# Altium PCB NE-CurrentSense-V2.PcbDoc
Units mm, origin at the board's own origin, x right, y up, seen from the top; angles counter-clockwise.
Board outline 98.25 x 80.25 mm, 2 copper layers (Top Layer, Bottom Layer); 35 components, 19 nets, 87 pads, 480 vias.
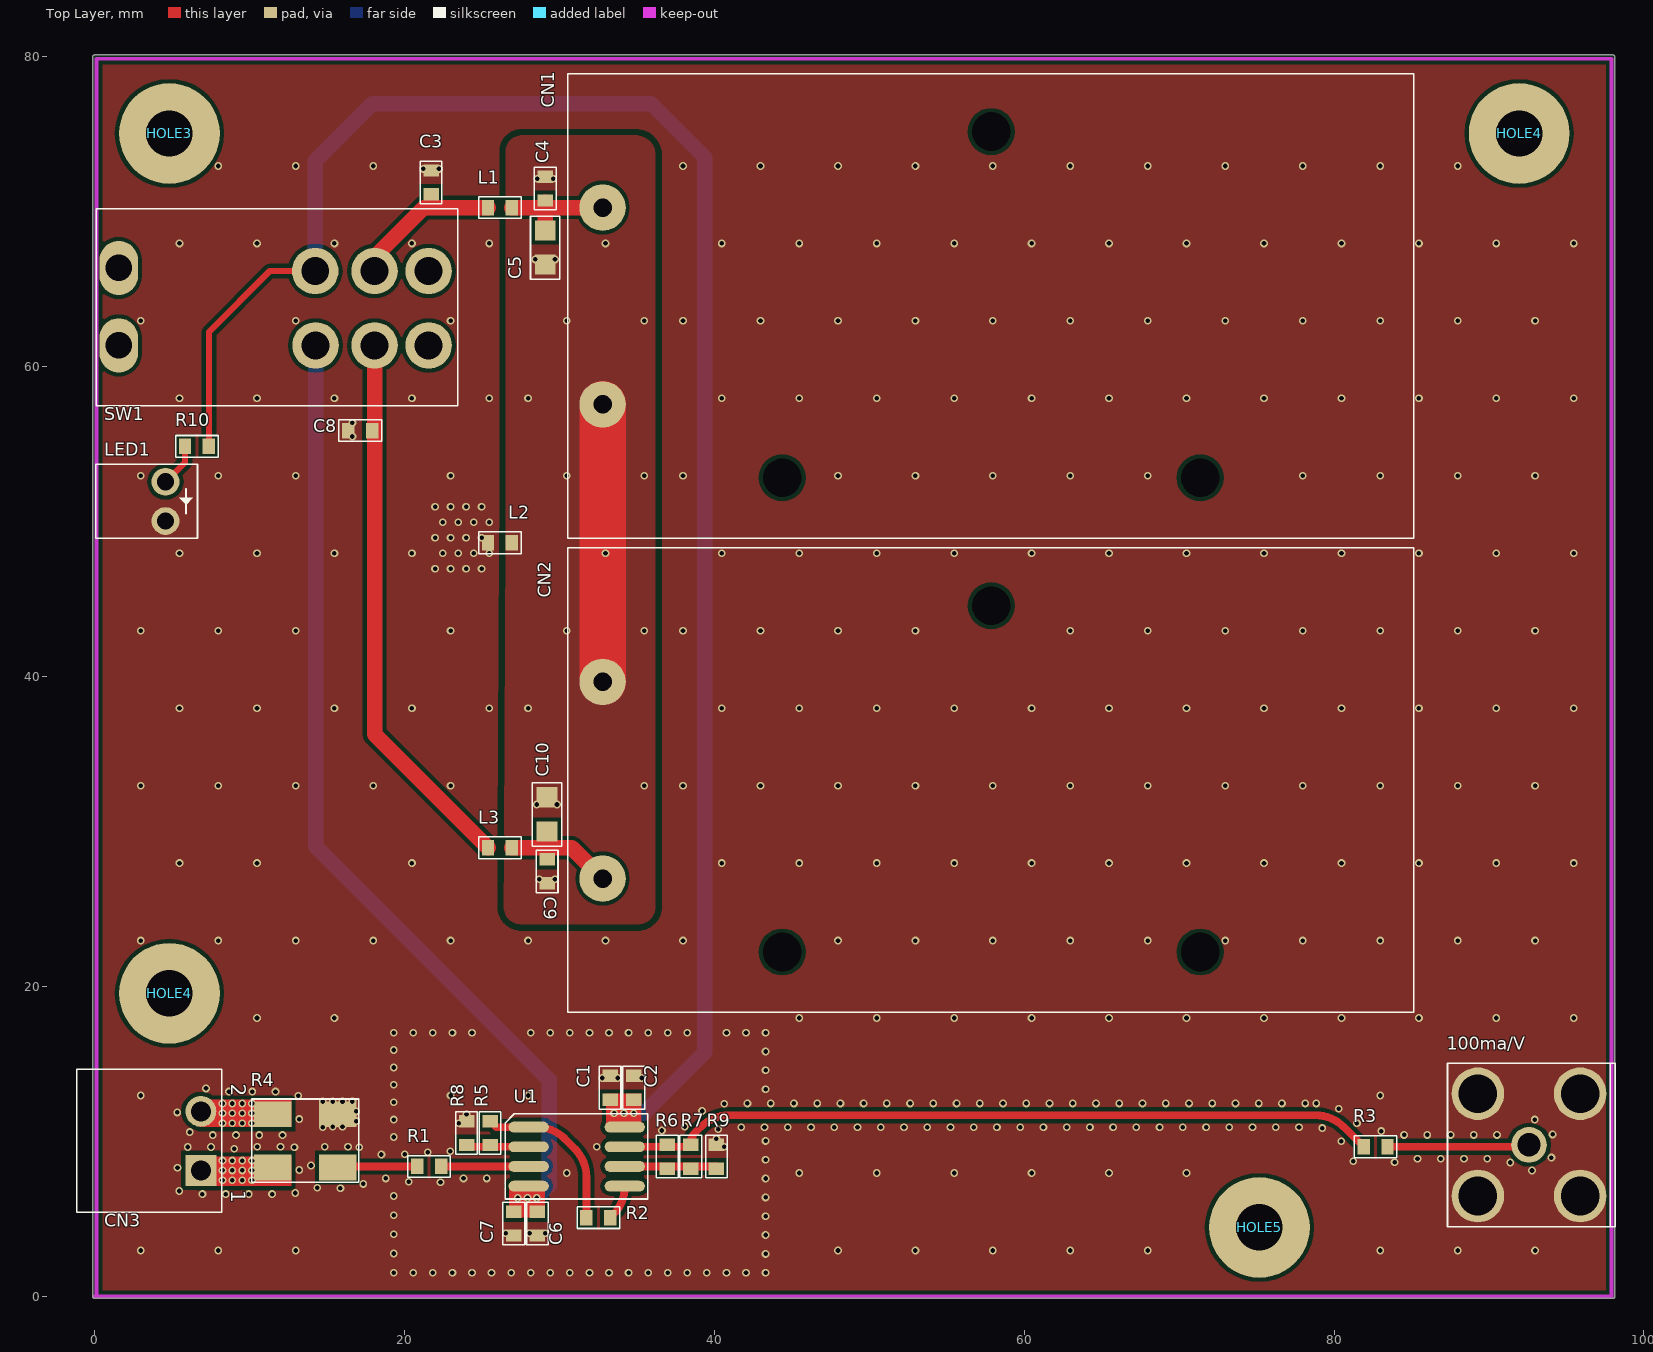
[diagram p0: Top Layer view]
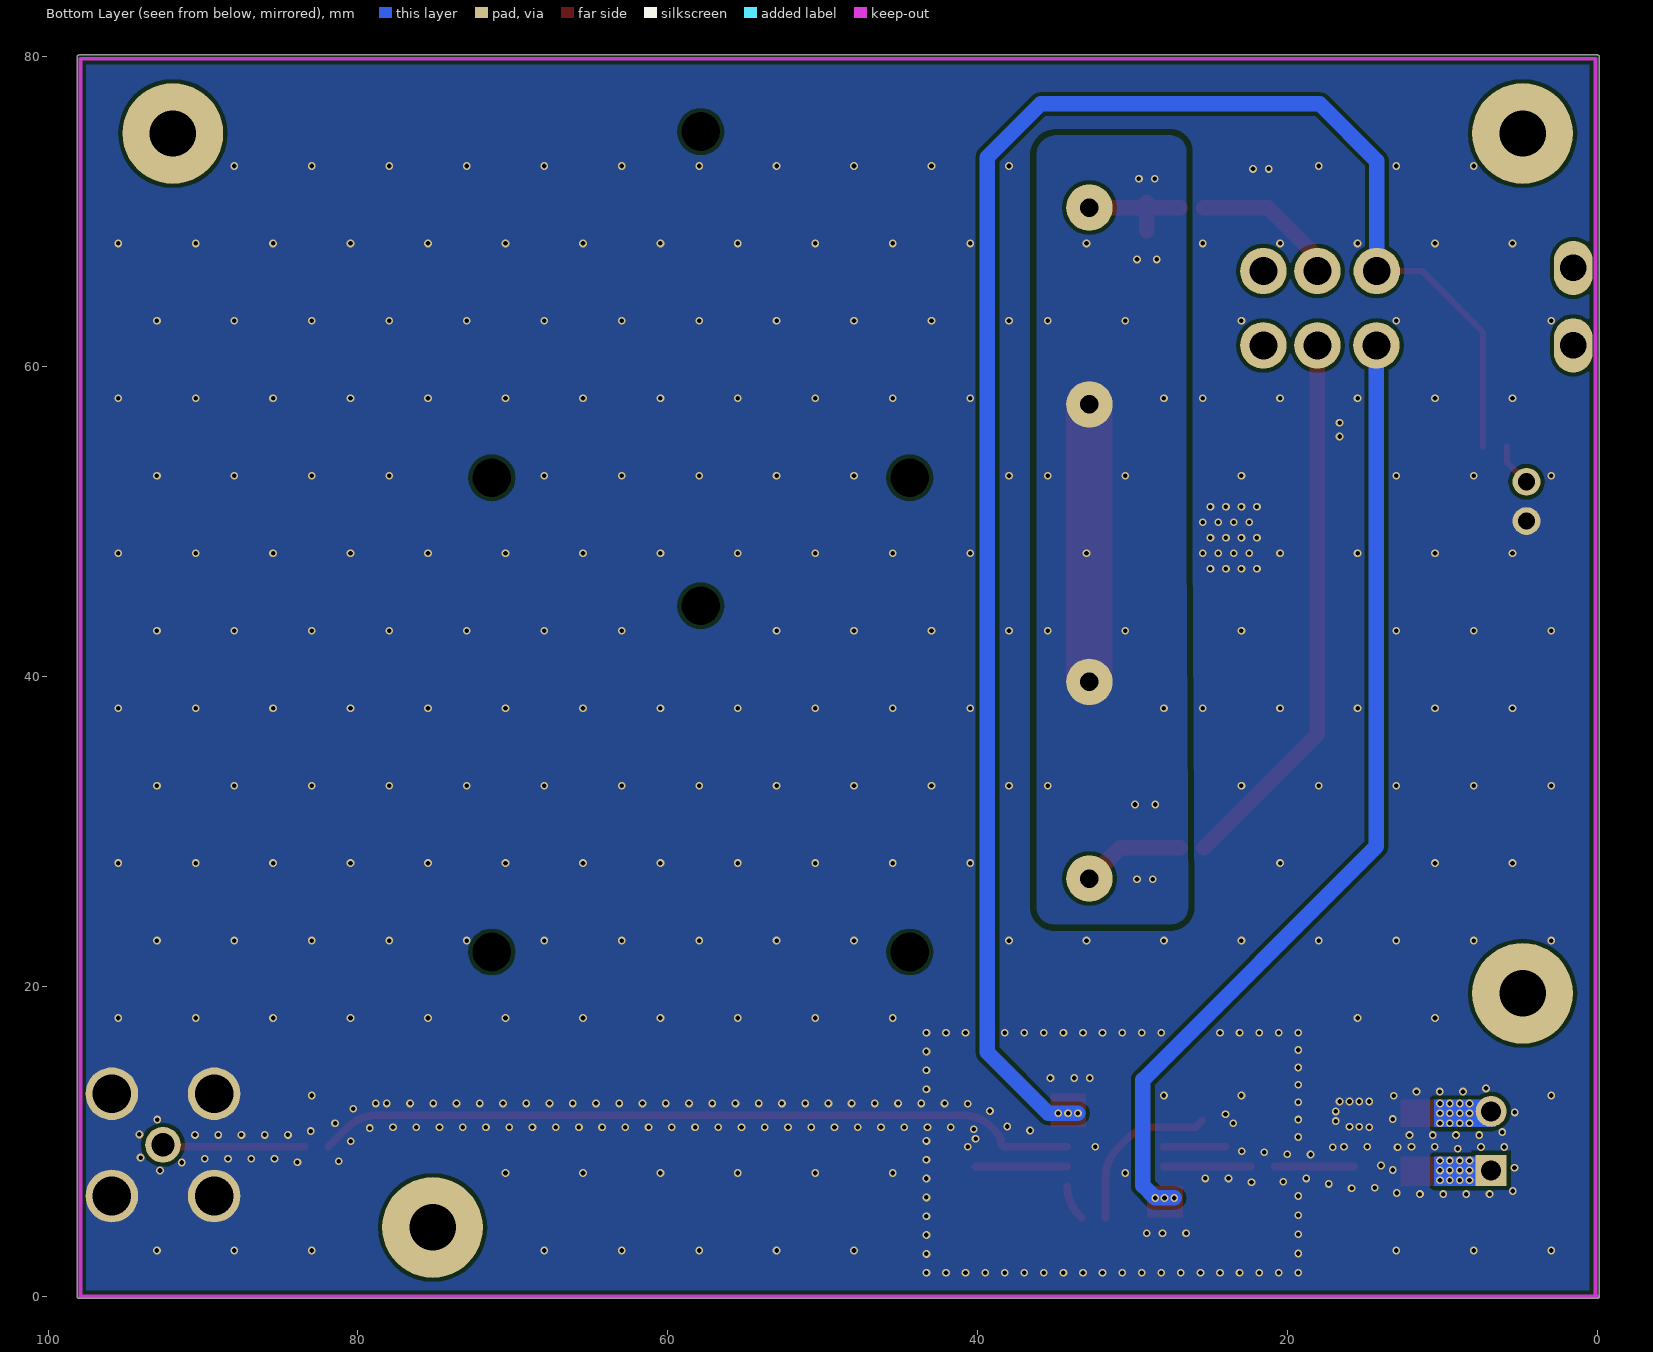
[diagram p1: Bottom Layer view, seen from below]
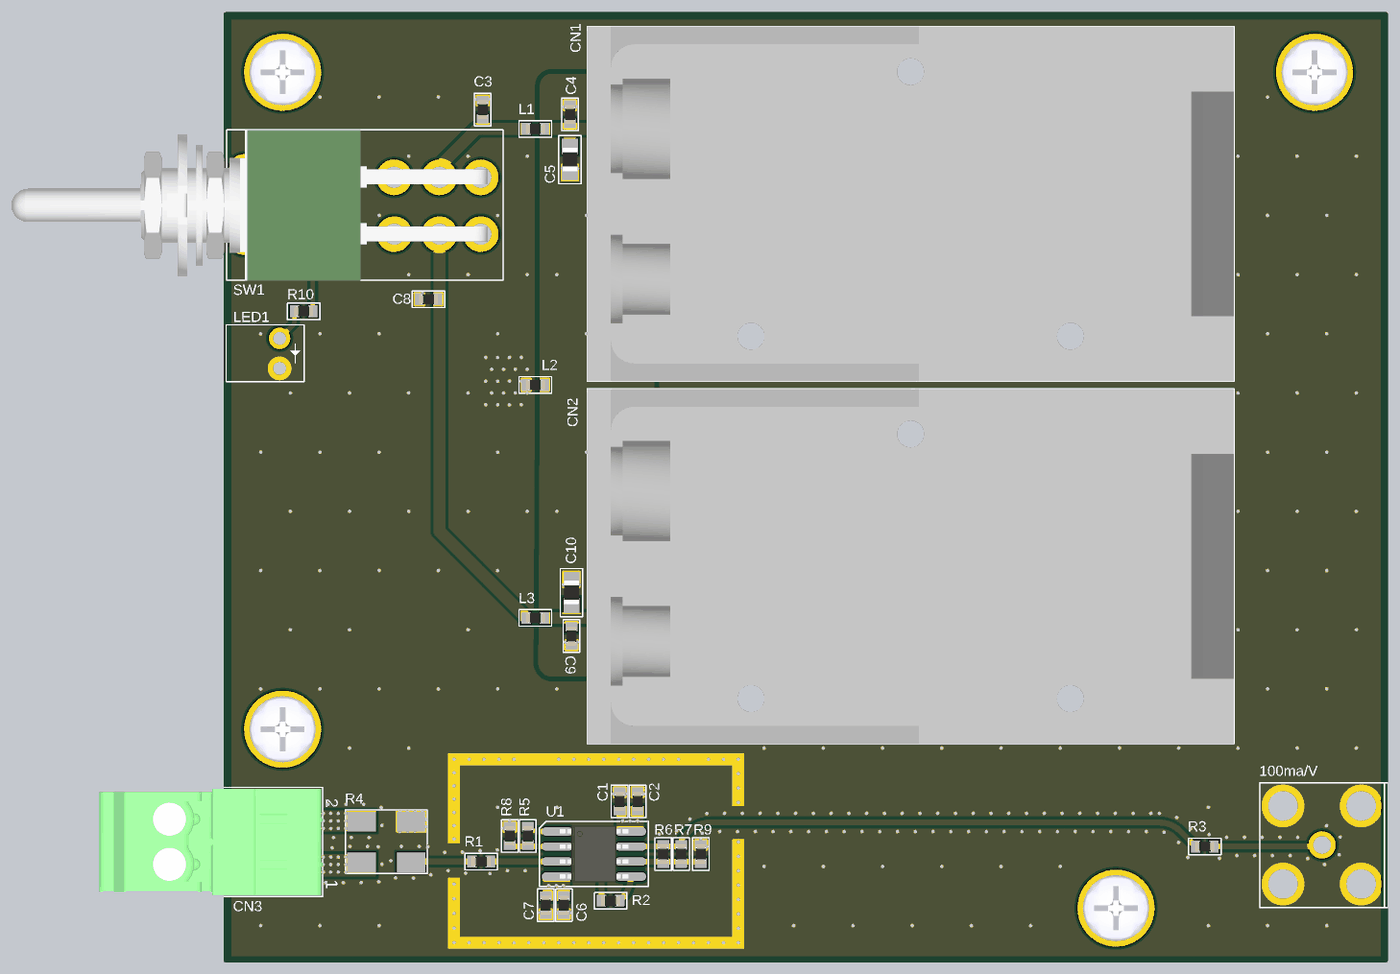
[diagram p2: 3D render of the assembled board from above, using the file's embedded part models]

## Layer stack, top to bottom
Top Solder: solder mask 0.0102, Solder Resist, Dk 3.5
Top Layer: signal copper 0.0356
Dielectric 1: dielectric 0.32, FR-4, Dk 4.8
Bottom Layer: signal copper 0.0356
Bottom Solder: solder mask 0.0102, Solder Resist, Dk 3.5

## Board outline
-0.127,0 ccw(c0,0) 0,-0.127 97.917,-0.127 ccw(c97.917,0) 97.958,-0.12 97.959,-0.12 ccw(c98,0) 98.127,0 98.127,80 ccw(c98,80) 98,80.127 0,80.127 ccw(c0,80) -0.127,80

## Design rules (kind name [scope] priority, off if disabled: settings)
Clearance [InNet('GND') vs InNet('NetC4_1')] p1: gap=0.4 ignorepadtopadclearanceinfootprint=FALSE
Clearance Clearance_1 [All] p2: gap=0.254 ignorepadtopadclearanceinfootprint=FALSE except(0: Arc-Hole Track-Hole SMDPad-Hole THPad-Hole Via-Hole Fill-Hole Poly-Hole Region-Hole Text-Hole)
PolygonConnect [All] p1: connectstyle=Direct reliefconductorwidth=0.254 reliefentries=4 polygonreliefangle="90 Angle" airgapwidth=0.254
RoutingVias [All] p1: holewidth=0.711 width=1.27 viastyle="Through Hole" minholewidth=0.711 minwidth=1.27 maxholewidth=0.711 maxwidth=1.27
SolderMaskExpansion [All] p1: expansion=0.102
Width [All] p1: maxlimit=4 minlimit=0.254 preferedwidth=0.254
30 further rules are at their usual default settings.

## Components (designator, comment, footprint, x,y, rotation, side; value= is the part's Value field where it differs from the comment)
100ma/V "Conn BNC" "CONN BNC-JACK" 92.583,9.779 r270 top value="Jack BNC"
C1 "Capacitor Cerâmico" CC0603 33.274,13.462 r270 top value=100nF
C2 "Capacitor Cerâmico" CC0603 34.798,13.462 r270 top value=1uF
C3 "Capacitor Cerâmico" CC0603 21.717,71.901 r270 top value=1uF
C4 "Capacitor Cerâmico" CC0603 29.083,71.501 r270 top value=1uF
C5 "Capacitor Cerâmico" CC0805 29.083,67.691 r90 top value=10uF
C6 "Capacitor Cerâmico" CC0603 28.575,4.699 r270 top value=100nF
C7 "Capacitor Cerâmico" CC0603 27.051,4.699 r270 top value=1uF
C8 "Capacitor Cerâmico" CC0603 17.145,55.88 r180 top value=1uF
C9 "Capacitor Cerâmico" CC0603 29.21,27.432 r270 top value=1uF
C10 "Capacitor Cerâmico" CC0805 29.21,31.115 r90 top value=10uF
CN1 "Holder" BATTHOLDER-9V-BH9V-PC-ND 52.07,64.008 r180 top value="Holder 9V BAT"
CN2 "Holder" BATTHOLDER-9V-BH9V-PC-ND 52.07,33.401 r180 top value="Holder 9V BAT"
CN3 "Block" "CONN BLOCK2 RCPT/H" 6.858,8.128 r180 top value="Receptáculo - 2 Polos"
CN#1 "Conector Externo" N/A 121.666,42.799 r90 top value="Plug - 2 Polos"
HOLE3 "Furo de Fixação" Furo_M3 4.826,75.057 r0 top value=M3
HOLE4 "Furo de Fixação" Furo_M3 91.948,75.057 r0 top value=M3
HOLE4 "Furo de Fixação" Furo_M3 4.826,19.558 r0 top value=M3
HOLE5 "Furo de Fixação" Furo_M3 75.184,4.445 r0 top value=M3
L1 "Bead" CC0603 26.162,70.273 r0 top value=100R@100MHz
L2 "Bead" CC0603 26.162,48.641 r0 top value=100R@100MHz
L3 "Bead" CC0603 26.162,28.956 r0 top value=100R@100MHz
LED1 "LED" LED-INDIC 4.572,51.308 r270 top value=Verde
R1 "Resistor" CC0603 21.59,8.382 r0 top value=100R
R2 "Resistor" CC0603 32.512,5.08 r0 top value=100R
R3 "Resistor" CC0603 82.677,9.652 r0 top value=49R9
R4 "Resistor" "CC2516 - Wide Vishay" 13.589,10.033 r0 top value="1R 1W"
R5 "Resistor" CC0603 25.527,10.541 r90 top value=1K
R6 "Resistor" CC0603 36.957,9.017 r90 top value=3K9
R7 "Resistor Open" CC0603 38.481,9.017 r90 top value=OPEN
R8 "Resistor" CC0603 24.003,10.541 r270 top value=100R
R9 "Resistor" CC0603 40.132,9.017 r270 top value=470R
R10 "Resistor" CC0603 6.604,54.864 r0 top value=470R
SW1 "M2022SS1W40" "SWITCH TOGGLE DPDT 6A 125V" 11.557,63.881 r0 top value=ON-ON
U1 "OPA1612AID" SOIC-8N 31.115,9.017 r0 top value=10MHz

## Footprints (in the part's own frame and the unit in brackets; to place one, negate y for a bottom-side part, rotate by r counter-clockwise, add the part's x,y. Pads: shape width x height; smd on the part's side, far side on the other; paste and mask are expansions set on the pad)
BATTHOLDER-9V-BH9V-PC-ND [mm]
  round 1.524 hole 2.5 unplated: 0(-19.285,11.175) 0(-5.805,-11.175) 0(7.685,11.175)
  round 3 hole 1.2: 1(19.285,6.435) 2(19.285,-6.265)
  silkscreen extent -33.08,-14.91 21.53,15.06, body extent -33.08,-14.91 21.53,15.06, height 20.7
CC0603 [mm] "Chip Resistor, 2-Leads, Body 1,6x0,8mm, IPC Medium Density"
  rect 0.8x1 smd: 1(-0.77,0) 2(0.77,0)
  silkscreen extent -1.38,-0.7 1.38,0.7, body extent -0.8,-0.42 0.8,0.43, height 0.45
CC0805 [mm] "Chip Resistor, 2-Leads, Body 2,0x1,2mm, IPC Medium Density"
  rect 1.3x1.35 smd: 1(-1.1,0) 2(1.1,0)
  silkscreen extent -2.05,-0.95 2.02,0.95, body extent -1,-0.62 1,0.63, height 0.6
"CC2516 - Wide Vishay" [mm]
  rect 2.41x1.65 smd: 1(-2.095,1.715) 2(2.095,1.715) 3(-2.095,-1.715) 4(2.095,-1.715)
  silkscreen extent -3.46,-2.67 3.45,2.71, body extent -3.18,-2.03 3.18,2.03, height 1.27
"CONN BLOCK2 RCPT/H" [mm] "Conector Shrouded Block. Macho, 2 Pin, Horizontal"
  rect 2x2 hole 1.3: 1(0,0)
  round 2 hole 1.3: 2(0,-3.81)
  silkscreen extent -1.35,-6.52 8,2.7, body extent -1.34,-6.42 17.48,2.59, height 8.6
"CONN BNC-JACK" [mm]
  round 2.3 hole 1.5: 1(0,0)
  round 3.4 hole 2.5: 2(-3.3,3.3) 2(-3.3,-3.3) 2(3.3,3.3) 2(3.3,-3.3)
  silkscreen extent -5.26,-5.26 5.28,5.55, body extent -5.16,-5.19 5.2,22.9, height 10.95
Furo_M3 [mm] "Furo metalizado para parafuso M3"
  round 6.5 hole 3 unplated paste+0: X(0,0)
  body extent -2.8,-2.8 2.8,2.8, height 2.38
LED-INDIC [mm]
  round 1.8 hole 1.1: 1(-1.27,0) 2(1.27,0)
  silkscreen extent -2.4,-4.51 2.38,2.07, body extent -2.3,-6.81 2.3,1.95, height 7.3
N/A [mm]
SOIC-8N [mm] "SOIC, 8-Leads, Body 4.9x3.9mm, Pitch 1.27mm, IPC Medium Density"
  oval 2.6x0.7 smd: 1(-3.1,1.905) 2(-3.1,0.635) 3(-3.1,-0.635) 4(-3.1,-1.905) 5(3.1,-1.905) 6(3.1,-0.635) 7(3.1,0.635) 8(3.1,1.905)
  silkscreen extent -4.61,-2.73 4.6,2.76, body extent -2.9,-2.4 2.9,2.4, height 1.75
"SWITCH TOGGLE DPDT 6A 125V" [mm] "Chave Seletora SPDT para SubPanel com angulo lateral. Thru-Hole"
  round 3 hole 1.8: 1(2.7,-2.5) 2(6.51,-2.5) 3(10,-2.5) 4(2.681,2.3) 5(6.51,2.3) 6(10,2.3)
  oval 2.5x3.5 hole 1.7: 7(-10,-2.5) 7(-10,2.5)
  silkscreen extent -11.45,-6.39 11.88,6.31, body extent -29.62,-6.42 10.58,6.28, height 13.5

## Part data
100ma/V: "Conector BNC", Supplier Part Number 1=A97569-ND, ChinesePrice=0,00000, Chinês=----, ComponentLink1Description=Datasheet, ComponentLink1URL=D:\Tecnoclade\Datasheet\!DataMissing.pdf, Supplier 1=Digi-Key
C1 C6: library part "Cap 100nF 25V 0603 X7R", "Capacitor (Semiconductor SIM Model)", Supplier Part Number 1=490-1524-1-ND, Tolerância=±10%, ChinesePrice=0,00246, Chinês=Local, ComponentLink1Description=Datasheet, ComponentLink1URL=D:\Tecnoclade\Datasheet\!DataMissing.pdf, Corrente=*A, Obs=X7R, Potência=*W, Supplier 1=Digi-Key, Tensão=25V
C2 C3 C4 C7 C8 C9: library part "Cap 1uF 50V 0603 X5R", "Capacitor (Semiconductor SIM Model)", Supplier Part Number 1=587-2400-1-ND, Tolerância=±10%, ChinesePrice=0,01100, Chinês=Local, ComponentLink1Description=Datasheet, ComponentLink1URL=D:\Tecnoclade\Datasheet\!DataMissing.pdf, Corrente=*A, Obs=X5R, Potência=*W, Supplier 1=Digi-Key, Tensão=50V
C5 C10: library part "Cap 10uF 25V 0805 X5R", "Capacitor (Semiconductor SIM Model)", Supplier Part Number 1=587-2985-1-ND, Tolerância=±10%, ChinesePrice=0,02620, Chinês=Local, ComponentLink1Description=Datasheet, ComponentLink1URL=D:\Tecnoclade\Datasheet\!DataMissing.pdf, Corrente=*A, Obs=X5R, Potência=*W, Supplier 1=Digi-Key, Tensão=25V
CN1 CN2: library part "BattHolder 9V", Supplier Part Number 1=BH9V-PC-ND, ChinesePrice=0,00000, Chinês=----, ComponentLink1Description=Datasheet, ComponentLink1URL=D:\Tecnoclade\Datasheet\!DataMissing.pdf, Corrente=*A, Supplier 1=Digi-Key, Tensão=*V
CN3: library part "SHRD Block 2P RCPT-H P3.81mm", "Conector Shrouded Block", Supplier Part Number 1=ED2808-ND, ChinesePrice=0,00000, Chinês=----, ComponentLink1Description=Datasheet, ComponentLink1URL=D:\Tecnoclade\Datasheet\!DataMissing.pdf, Corrente=10A, Supplier 1=Digi-Key, Tensão=300V
CN#1: library part "Plug Block 2P 3.81mm", "Conector Plug", Supplier Part Number 1=ED2875-ND, Tolerância="16~26 AWG", ChinesePrice=0,00000, Chinês=----, ComponentLink1Description=Datasheet, ComponentLink1URL=D:\Tecnoclade\Datasheet\!DataMissing.pdf, Corrente=10A, Supplier 1=Digi-Key, Tensão=300V
HOLE3 HOLE4 HOLE4 HOLE5: library part Parafuso, "Furo para parafuso", Supplier Part Number 1=--Del, ChinesePrice=0,00000, Chinês=----, ComponentLink1Description=Datasheet, ComponentLink1URL=D:\Tecnoclade\Datasheet\!DataMissing.pdf, Supplier 1=Digi-Key
L1 L2 L3: library part "Bd 100R@100MHz 0603 2A", Supplier Part Number 1=445-2984-1-ND, Tolerância=±25%, ChinesePrice=0,00000, Chinês=----, ComponentLink1Description=Datasheet, ComponentLink1URL=D:\Tecnoclade\Datasheet\!DataMissing.pdf, Corrente=2A, Obs="Ferrite (0R04)", Substituição=00/00/0000, Supplier 1=Digi-Key
LED1: library part LED2, "Typical RED, GREEN, YELLOW, AMBER GaAs LED", Supplier Part Number 1=754-1297-ND, ChinesePrice=0,00000, Chinês=----, Supplier 1=Digi-Key, VertSimCode="} XXXXX {"
R1 R2 R8: library part "Res 100R 5% 0603 1/10W", Supplier Part Number 1=RMCF0603JT100RCT-ND, Tolerância=±5%, ChinesePrice=0,00080, Chinês=Local, ComponentLink1Description=Datasheet, ComponentLink1URL=D:\Tecnoclade\Datasheet\!DataMissing.pdf, Corrente=*A, Potência=1/10W, Supplier 1=Digi-Key, Tensão=*V
R3: library part "Res 49R9 1% 0603 1/10W", Supplier Part Number 1=P49.9HCT-ND, Tolerância=±1%, ChinesePrice=0,00089, Chinês=Local, ComponentLink1Description=Datasheet, ComponentLink1URL=D:\Tecnoclade\Datasheet\!DataMissing.pdf, Corrente=*A, Potência=1/10W, Supplier 1=Digi-Key, Tensão=*V
R4: library part "Res 1R 0.1% CC2516-Wide-4W 1W", Supplier Part Number 1=Y1606-1.0B-ND, Tolerância=±*%, ChinesePrice=0,00000, Chinês=----, ComponentLink1Description=Datasheet, ComponentLink1URL=D:\Tecnoclade\Datasheet\!DataMissing.pdf, Corrente=*A, Potência=1/10W, Supplier 1=Digi-Key, Tensão=*V
R5: library part "Res 1K 0.1% 0603 1/16W", Supplier Part Number 1=A102332CT-ND, Tolerância=±0.1%, ChinesePrice=0,00000, Chinês=----, ComponentLink1Description=Datasheet, ComponentLink1URL=D:\Tecnoclade\Datasheet\!DataMissing.pdf, Corrente=*A, Obs=±25ppm/ºC, Potência=1/16W, Supplier 1=Digi-Key, Tensão=*V
R6: library part "Res 3K9 1% 0603 1/10W", Supplier Part Number 1=311-3.90KHRCT-ND, Tolerância=±1%, ChinesePrice=0,00000, Chinês=----, ComponentLink1Description=Datasheet, ComponentLink1URL=D:\Tecnoclade\Datasheet\!DataMissing.pdf, Corrente=*A, Obs=±100ppm/ºC, Potência=1/10W, Supplier 1=Digi-Key, Tensão=*V
R7: library part "Res Open 0603", "Resistor", Supplier Part Number 1=--Del, Tolerância=±*%, ChinesePrice=0,00000, Chinês=----, ComponentLink1Description=Datasheet, ComponentLink1URL=D:\Tecnoclade\Datasheet\!DataMissing.pdf, Corrente=*A, Potência=*W, Supplier 1=Digi-Key, Tensão=*V
R9 R10: library part "Res 470R 5% 0603 1/10W", Supplier Part Number 1=RMCF0603JT470RCT-ND, Tolerância=±5%, ChinesePrice=0,00000, Chinês=----, ComponentLink1Description=Datasheet, ComponentLink1URL=D:\Tecnoclade\Datasheet\!DataMissing.pdf, Corrente=*A, Obs=±200ppm/ºC, Potência=1/10W, Supplier 1=Digi-Key, Tensão=*V
SW1: library part SW-DPDT, "Double-Pole, Double-Throw Switch", Supplier Part Number 1=M2022SS1W40-ND, ChinesePrice=1,64000, Chinês=Local, ComponentLink1Description=Datasheet, ComponentLink1URL=D:\Tecnoclade\Datasheet\, Corrente=6A, Supplier 1=Digi-Key, Tensão=125V
U1: library part OPA2197, "OPAx197 36-V, Precision, Rail-to-Rail Input/Output, Low Offset Voltage, Operational Amplifiers", Supplier Part Number 1=296-24959-5-ND, ChinesePrice=0,00000, Chinês=----, ComponentLink1Description=Datasheet, ComponentLink1URL=D:\Tecnoclade\Datasheet\, Corrente=65mA, Obs=Rail-To-Rail, Supplier 1=Digi-Key, Tensão=36V

## Via types
v1: diameter 0.5, hole 0.3, Top Layer to Bottom Layer, tented both sides, 480 vias

## Nets (pads, with @x,y where several pads share a name; then routed paths per layer and width w, separated by ;. In a path a pad name is that pad's centre, name@x,y a point inside that pad or via, vN(x,y) a via of type N, cw(c..) or ccw(c..) an arc to the next point about the centre after c; other vN are vias at no path point)
9V_SW: C1.2 C2.2 R10.2 SW1.4 U1.8 | length 116.3
  Top Layer w0.4: R10.2 7.374,62.238 11.317,66.181 SW1.4
  Bottom Layer w1: SW1.4 14.238,73.293 17.907,76.962 35.941,76.962 39.37,73.533 39.37,15.748 35.433,11.811 v1(33.528,11.811)
  other v1: 34.163,11.811 34.798,11.811
+9V: C3.2 L1.1 SW1.5 | length 9.6
  Top Layer w1: SW1.5 18.067,67.089 21.251,70.273 L1.1
-9V: C8.1 L3.1 SW1.2 | length 35.5
  Top Layer w1: SW1.2 18.067,36.281 L3.1
GND: 100ma/V.2 C1.1 C2.1 C3.1 C6.2 C7.2 C8.2 L2.1 LED1.2 R4.2 R8.1 R9.1
  other v1: 19.304,1.524 20.567,1.524 21.831,1.524 23.094,1.524 24.357,1.524 25.621,1.524 26.884,1.524 28.147,1.524 29.411,1.524 30.674,1.524 31.937,1.524 33.2,1.524 34.464,1.524 35.727,1.524 36.99,1.524 38.254,1.524 39.517,1.524 39.517,1.524 40.78,1.524 42.044,1.524 43.307,1.524 43.307,2.74 19.304,2.762 2.977,2.963 7.977,2.963 12.977,2.963 47.977,2.963 52.977,2.963 57.977,2.963 62.977,2.963 67.977,2.963 82.977,2.963 87.977,2.963 92.977,2.963 43.307,3.955 19.304,4 26.546,4.064 28.067,4.064 29.083,4.064 43.307,5.171 19.304,5.239 43.307,6.386 19.304,6.477 6.955,6.598 8.455,6.598 9.955,6.598 11.455,6.598 12.953,6.675 5.469,6.803 15.864,6.979 14.364,7.002 17.338,7.257 22.326,7.368 20.279,7.396 43.307,7.602 18.795,7.613 23.806,7.613 25.306,7.613 30.477,7.963 45.477,7.963 50.477,7.963 55.477,7.963 60.477,7.963 65.477,7.963 70.477,7.963 92.778,8.127 13.214,8.152 5.344,8.298 13.965,8.448 91.367,8.635 83.906,8.65 81.246,8.72 43.307,8.817 85.388,8.883 86.888,8.883 88.388,8.883 89.888,8.883 94.03,8.954 18.511,9.151 20.011,9.177 21.506,9.297 22.957,9.357 9.006,9.531 12.896,9.618 17.086,9.618 6.01,9.642 7.51,9.642 10.501,9.657 12.001,9.657 14.853,9.657 16.353,9.657 32.404,9.652 40.64,9.652 80.469,10.003 43.307,10.033 40.132,10.178 19.304,10.287 7.626,10.408 9.126,10.408 10.626,10.408 12.126,10.408 84.522,10.421 86.022,10.421 87.522,10.421 89.022,10.421 90.522,10.421 94.105,10.452 6.139,10.602 83.042,10.665 36.615,10.701 40.246,10.778 79.238,10.861 14.732,10.922 41.739,10.915 43.239,10.915 44.739,10.915 46.239,10.915 47.739,10.915 49.239,10.915 50.739,10.915 52.239,10.915 53.739,10.915 55.239,10.915 56.739,10.915 58.239,10.915 59.739,10.915 61.239,10.915 62.739,10.915 64.239,10.915 65.739,10.915 67.239,10.915 68.739,10.915 70.239,10.915 71.739,10.915 73.239,10.915 74.739,10.915 76.239,10.915 77.739,10.915 15.367,10.94 16.002,10.94 38.091,10.966 23.495,11.176 81.476,11.17 16.891,11.311 19.304,11.409 92.95,11.409 13.214,11.441 24.003,11.748 5.34,11.872 16.891,11.938 39.21,11.965 80.302,12.104 40.635,12.435 42.135,12.453 43.635,12.453 45.135,12.453 46.635,12.453 48.135,12.453 49.635,12.453 51.135,12.453 52.635,12.453 54.135,12.453 55.635,12.453 57.135,12.453 58.635,12.453 60.135,12.453 61.635,12.453 63.135,12.453 64.635,12.453 66.135,12.453 67.635,12.453 69.135,12.453 70.635,12.453 72.135,12.453 73.635,12.453 75.135,12.453 76.635,12.453 78.135,12.453 78.843,12.453 19.304,12.531 14.732,12.573 15.367,12.573 16.002,12.573 16.637,12.573 13.146,12.939 2.977,12.963 22.977,12.963 27.977,12.963 82.977,12.963 8.672,13.214 10.172,13.214 11.672,13.214 43.307,13.371 7.186,13.422 19.304,13.652 32.766,14.097 33.764,14.097 35.306,14.097 43.307,14.587 19.304,14.774 43.307,15.802 19.304,15.896 19.304,17.018 20.567,17.018 21.831,17.018 23.094,17.018 24.357,17.018 28.147,17.018 29.411,17.018 30.674,17.018 31.937,17.018 33.2,17.018 34.464,17.018 35.727,17.018 36.99,17.018 38.254,17.018 40.78,17.018 42.044,17.018 43.307,17.018 10.477,17.963 15.477,17.963 45.477,17.963 50.477,17.963 55.477,17.963 60.477,17.963 65.477,17.963 70.477,17.963 75.477,17.963 80.477,17.963 85.477,17.963 90.477,17.963 95.477,17.963 2.977,22.963 7.977,22.963 12.977,22.963 17.977,22.963 22.977,22.963 27.977,22.963 32.977,22.963 37.977,22.963 47.977,22.963 52.977,22.963 57.977,22.963 62.977,22.963 67.977,22.963 72.977,22.963 77.977,22.963 82.977,22.963 87.977,22.963 92.977,22.963 5.477,27.963 10.477,27.963 20.477,27.963 40.477,27.963 45.477,27.963 50.477,27.963 55.477,27.963 60.477,27.963 65.477,27.963 70.477,27.963 75.477,27.963 80.477,27.963 85.477,27.963 90.477,27.963 95.477,27.963 2.977,32.963 7.977,32.963 12.977,32.963 17.977,32.963 22.977,32.963 37.977,32.963 42.977,32.963 47.977,32.963 52.977,32.963 57.977,32.963 62.977,32.963 67.977,32.963 72.977,32.963 77.977,32.963 82.977,32.963 87.977,32.963 92.977,32.963 5.477,37.963 10.477,37.963 15.477,37.963 20.477,37.963 25.477,37.963 40.477,37.963 45.477,37.963 50.477,37.963 55.477,37.963 60.477,37.963 65.477,37.963 70.477,37.963 75.477,37.963 80.477,37.963 85.477,37.963 90.477,37.963 95.477,37.963 2.977,42.963 7.977,42.963 12.977,42.963 22.977,42.963 37.977,42.963 42.977,42.963 47.977,42.963 52.977,42.963 62.977,42.963 67.977,42.963 72.977,42.963 77.977,42.963 82.977,42.963 87.977,42.963 92.977,42.963 21.977,46.963 22.977,46.963 23.977,46.963 24.977,46.963 5.477,47.963 10.477,47.963 15.477,47.963 20.477,47.963 22.477,47.963 23.477,47.963 24.477,47.963 25.477,47.963 40.477,47.963 45.477,47.963 50.477,47.963 55.477,47.963 60.477,47.963 65.477,47.963 70.477,47.963 75.477,47.963 80.477,47.963 85.477,47.963 90.477,47.963 95.477,47.963 21.977,48.963 22.977,48.963 23.977,48.963 24.977,48.963 22.477,49.963 23.477,49.963 24.477,49.963 25.477,49.963 21.977,50.963 22.977,50.963 23.977,50.963 24.977,50.963 2.977,52.963 7.977,52.963 12.977,52.963 22.977,52.963 37.977,52.963 47.977,52.963 52.977,52.963 57.977,52.963 62.977,52.963 67.977,52.963 77.977,52.963 82.977,52.963 87.977,52.963 92.977,52.963 16.637,55.499 16.637,56.388 5.477,57.963 10.477,57.963 15.477,57.963 20.477,57.963 25.477,57.963 40.477,57.963 45.477,57.963 50.477,57.963 55.477,57.963 60.477,57.963 65.477,57.963 70.477,57.963 75.477,57.963 80.477,57.963 85.477,57.963 90.477,57.963 95.477,57.963 2.977,62.963 12.977,62.963 22.977,62.963 37.977,62.963 42.977,62.963 47.977,62.963 52.977,62.963 57.977,62.963 62.977,62.963 67.977,62.963 72.977,62.963 77.977,62.963 82.977,62.963 87.977,62.963 92.977,62.963 5.477,67.963 10.477,67.963 15.477,67.963 20.477,67.963 25.477,67.963 40.477,67.963 45.477,67.963 50.477,67.963 55.477,67.963 60.477,67.963 65.477,67.963 70.477,67.963 75.477,67.963 80.477,67.963 85.477,67.963 90.477,67.963 95.477,67.963 21.209,72.771 22.225,72.771 7.977,72.963 12.977,72.963 17.977,72.963 37.977,72.963 42.977,72.963 47.977,72.963 52.977,72.963 57.977,72.963 62.977,72.963 67.977,72.963 72.977,72.963 77.977,72.963 82.977,72.963 87.977,72.963
Net100ma/V_1: 100ma/V.1 R3.2 | length 9
  Top Layer w0.5: R3.2 100ma/V.1@92.456,9.652
NetC4_1: C4.1 C5.1 C9.2 C10.2 CN1.1 CN2.2 L2.2 | length 17.9
  Top Layer w3: CN2.2 CN1.1
  other v1: 28.702,26.924 29.718,26.924 28.539,31.75 29.845,31.75 35.477,32.963 27.977,37.963 30.477,42.963 35.477,42.963 32.977,47.963 30.477,52.963 35.477,52.963 27.977,57.963 30.477,62.963 35.477,62.963 28.448,66.929 29.718,66.929 32.977,67.963 28.575,72.136 29.591,72.136
NetC4_2: C4.2 C5.2 CN1.2 L1.2 | length 7.7
  Top Layer w1: L1.2 29.083,70.273 ; C5.2 29.083,70.273 ; C4.2@29.083,70.604 29.083,70.273 ; CN1.2 29.083,70.273
NetC6_1: C6.1 C7.1 SW1.1 U1.4 | length 62.8
  Bottom Layer w1: SW1.1 14.257,29.053 29.337,13.973 29.337,7.148 v1(28.539,6.35) v1(27.94,6.35) v1(27.305,6.35)
NetC9_1: C9.1 C10.1 CN2.1 L3.2 | length 6.7
  Top Layer w1: L3.2 30.795,28.956 CN2.1
NetCN3_1: CN3.1 R4.3 | length 0.3
  Top Layer w1.5: CN3.1 cw(c7.048,8.128) CN3.1@7.048,8.318
  other v1: 8.255,7.493 8.89,7.493 9.525,7.493 10.16,7.493 8.255,8.128 8.89,8.128 9.525,8.128 10.16,8.128 8.255,8.763 8.89,8.763 9.525,8.763 10.16,8.763
NetCN3_2: CN3.2 R4.1 | length 0.3
  Top Layer w1.5: CN3.2 ccw(c7.048,11.938) CN3.2@7.048,11.748
  other v1: 8.255,11.176 8.89,11.176 9.525,11.176 10.16,11.176 8.255,11.811 8.89,11.811 9.525,11.811 10.16,11.811 8.255,12.446 8.89,12.446 9.525,12.446 10.16,12.446
NetLED1_1: LED1.1 R10.1 | length 2.8
  Top Layer w0.4: LED1.1 5.834,53.84 R10.1
NetR1_1: R1.1 R4.4 | length 5.1
  Top Layer w0.5: R4.4@15.684,8.382 R1.1
NetR1_2: R1.2 U1.3 | length 5.7
  Top Layer w0.5: R1.2 U1.3
NetR2_1: R2.1 R5.2 U1.1 | length 10.7
  Top Layer w0.5: R5.2 25.916,10.922 U1.1 28.539,10.922 cw(c28.539,8.382) 30.335,10.178 30.998,9.515 cw(c29.202,7.719) 31.742,7.719 R2.1
NetR2_2: R2.2 U1.5 | length 2.3
  Top Layer w0.5: R2.2 33.471,5.269 ccw(c31.675,7.065) 34.215,7.065 U1.5
NetR3_1: R3.1 R6.2 R7.2 U1.7 | length 49.4
  Top Layer w0.5: U1.7 38.155,9.652 ccw(c38.155,10.113) R7.2 38.481,9.914 cw(c39.382,9.914) 38.745,10.551 39.134,10.94 cw(c40.93,9.144) 40.93,11.684 78.823,11.684 cw(c78.823,9.144) 80.619,10.94 R3.1
NetR5_1: R5.1 R8.2 U1.2 | length 4
  Top Layer w0.5: R8.2@24.003,9.652 U1.2
NetR6_1: R6.1 R7.1 R9.2 U1.6 | length 5.9
  Top Layer w0.5: U1.6@34.215,8.374 36.957,8.374 38.481,8.374 R9.2@40.132,8.374
pads on no net: CN1.0 CN2.0 HOLE3.X HOLE4.X HOLE5.X SW1.3 SW1.6 SW1.7

## Polygon pours and split planes (outlines as drawn)
GND on Top Layer "Top Layer-No Net 1" (solid, pour order 2): 0,0 0,79.883 97.917,79.883 97.917,0
NetC4_1 on Top Layer "Top Layer-No Net 1" (solid, pour order 0): 26.543,48.895 26.543,73.914 cw(c27.559,73.914) 27.559,74.93 34.925,74.93 cw(c34.925,73.66) 36.195,73.66 36.195,25.146 cw(c35.052,25.146) 35.052,24.003 27.559,24.003 cw(c27.559,25.146) 26.416,25.146
NetC4_1 on Bottom Layer "Top Layer-No Net 1" (solid, pour order 6): 26.543,48.895 26.543,73.914 cw(c27.559,73.914) 27.559,74.93 34.925,74.93 cw(c34.925,73.66) 36.195,73.66 36.195,25.146 cw(c35.052,25.146) 35.052,24.003 27.559,24.003 cw(c27.559,25.146) 26.416,25.146
GND on Bottom Layer "Top Layer-No Net 1" (solid, remove dead copper, pour order 4): 0,0 0,79.883 97.917,79.883 97.917,0

## Keep-outs
Keep-Out Layer:
  lines w0.254: 0,0 97.917,0 97.917,79.883 0.127,79.883 0.127,0.127

## Other copper
Top Layer:
  rectangle net NetC6_1: 26.751,5.08 29.083,7.112
  rectangle net 9V_SW: 33.02,10.94 35.306,13.079
  rectangle net NetCN3_1: 6.604,7.112 12.7,9.017
  rectangle net NetCN3_2: 6.731,10.922 12.7,12.7
Bottom Layer:
  rectangle net NetCN3_2: 6.731,10.922 10.541,12.7
  rectangle net NetCN3_1: 6.604,7.112 10.541,9.017

## Silkscreen, mask and mechanical layers (free items; w line width, h text height)
Top Solder:
  rectangle: 42.798,13.081 43.798,17.51
  rectangle: 42.798,1.143 43.798,10.287
  rectangle: 18.795,9.906 19.795,17.435
  rectangle: 18.795,1.016 19.795,7.016
  rectangle: 18.795,1.016 43.795,2.016
  rectangle: 18.795,16.51 43.795,17.51
BOARD OUTLINE:
  lines w0.254: 97.917,0 0,0 0,72.263 0,80 98,80 98,0

## Text inside footprints (layer, text, board x,y; h text height)
CN3: Top Overlay "1" at 8.509,6.858 h1.6 r270; Top Overlay "2" at 8.509,13.716 h1.6 r270